# Altium PCB PCB1.PcbDoc
Units mil, origin at the board's own origin, x right, y up, seen from the top; angles counter-clockwise.
Board outline 1100 x 875 mil, 4 copper layers (Top Layer, T 1, Layer 2, Bottom Layer), stack 23.756 mil thick; 5 components, 5 nets, 17 pads, 3 vias.
Unrouted connection lines stored in the file: 8.
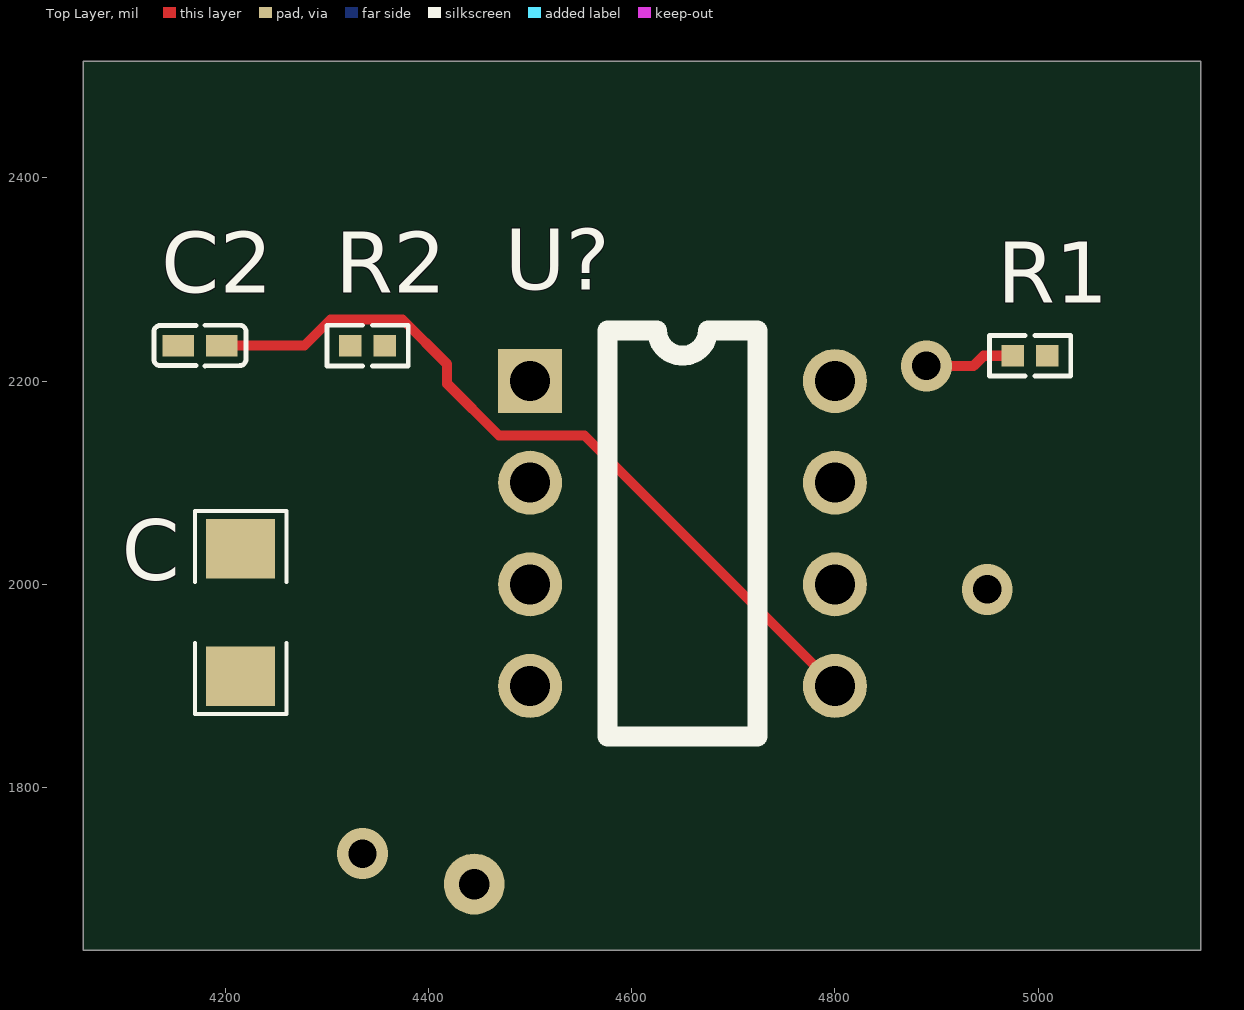
[diagram p0: Top Layer view]
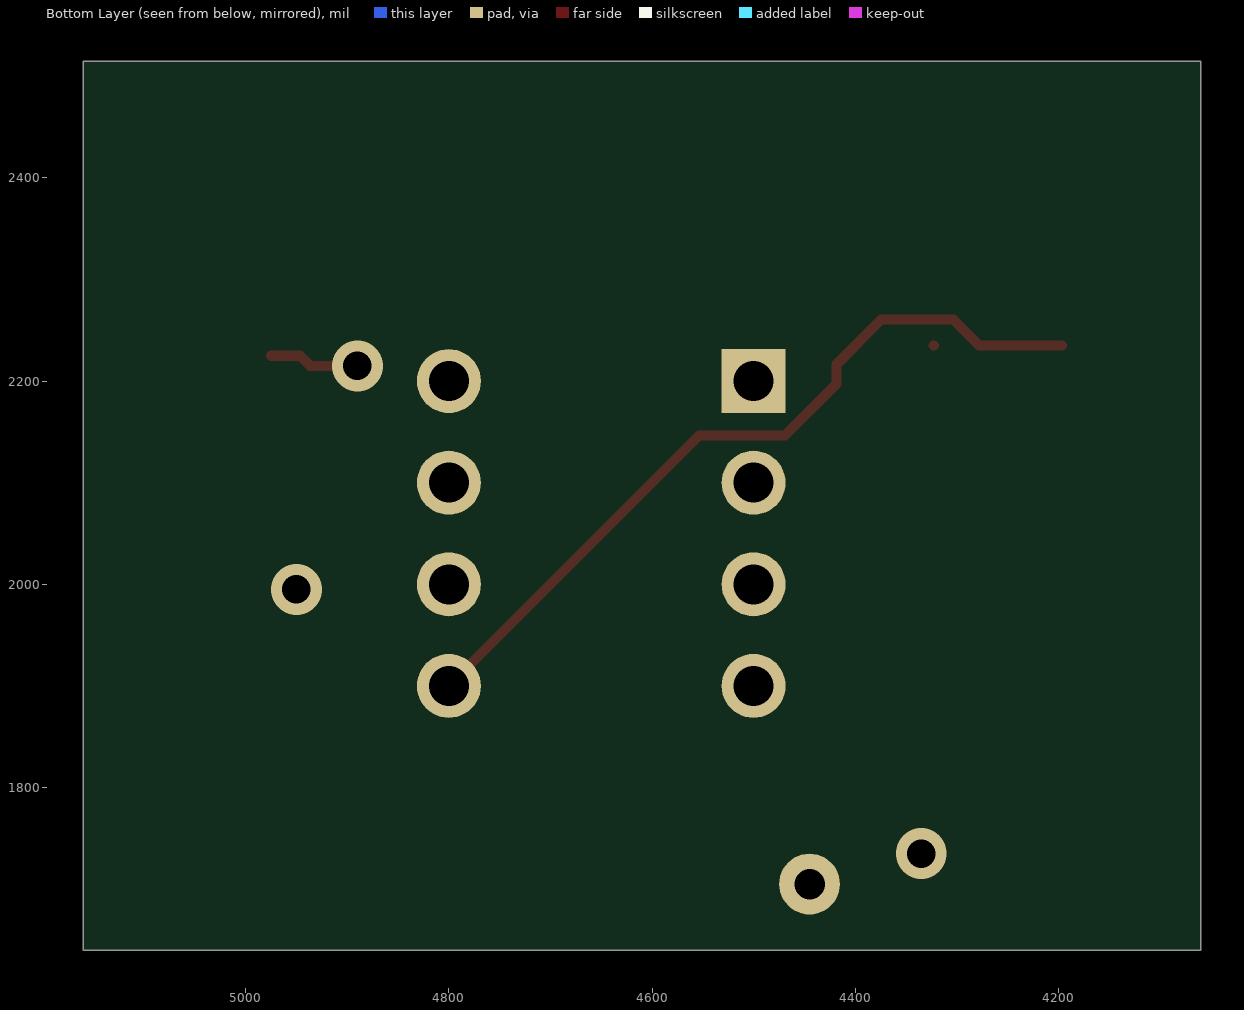
[diagram p1: Bottom Layer view, seen from below]
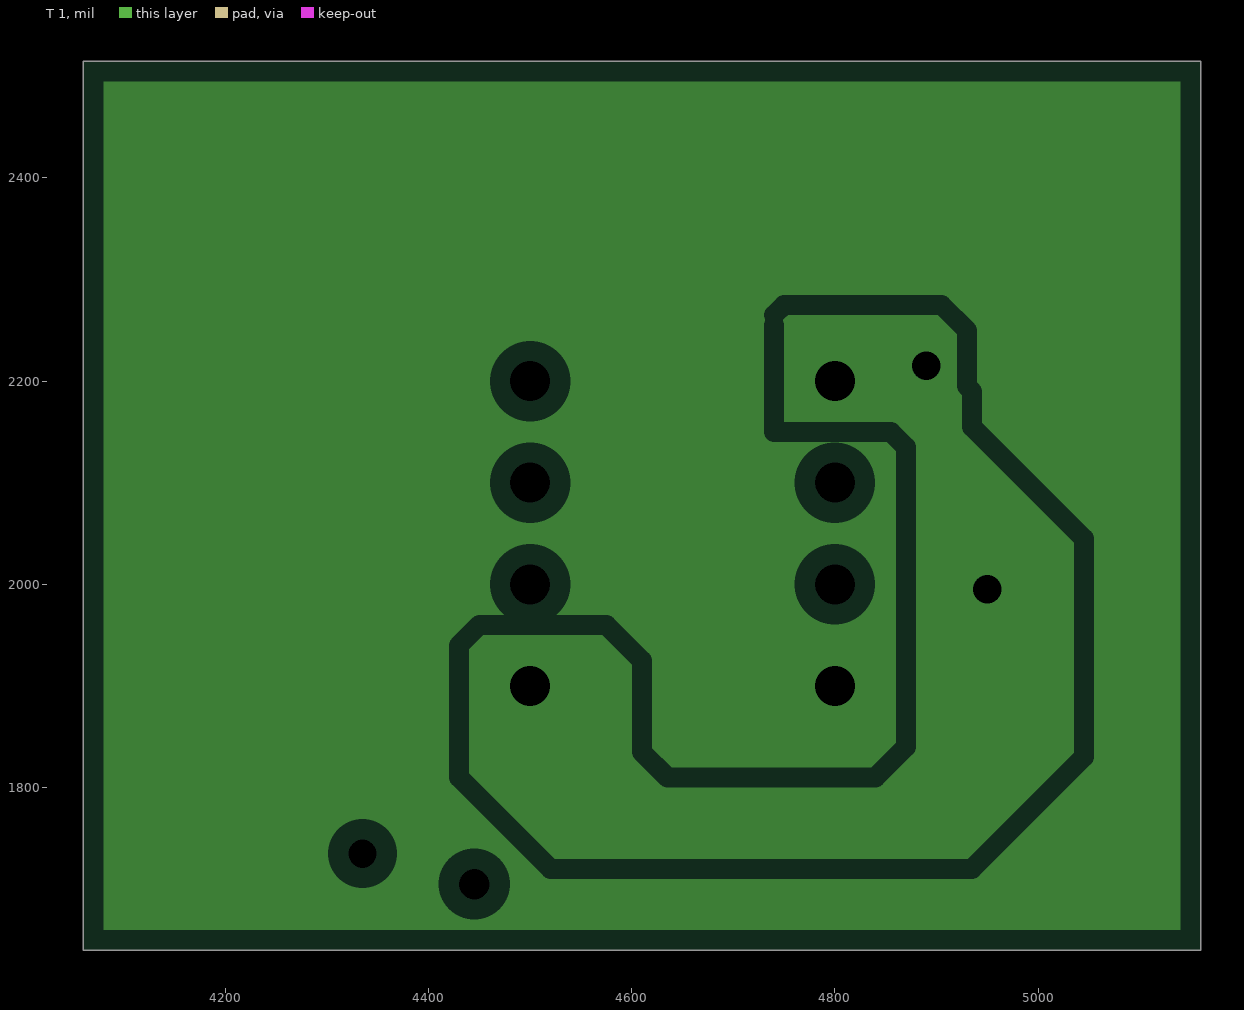
[diagram p2: T 1, clearances drawn from the general rule]
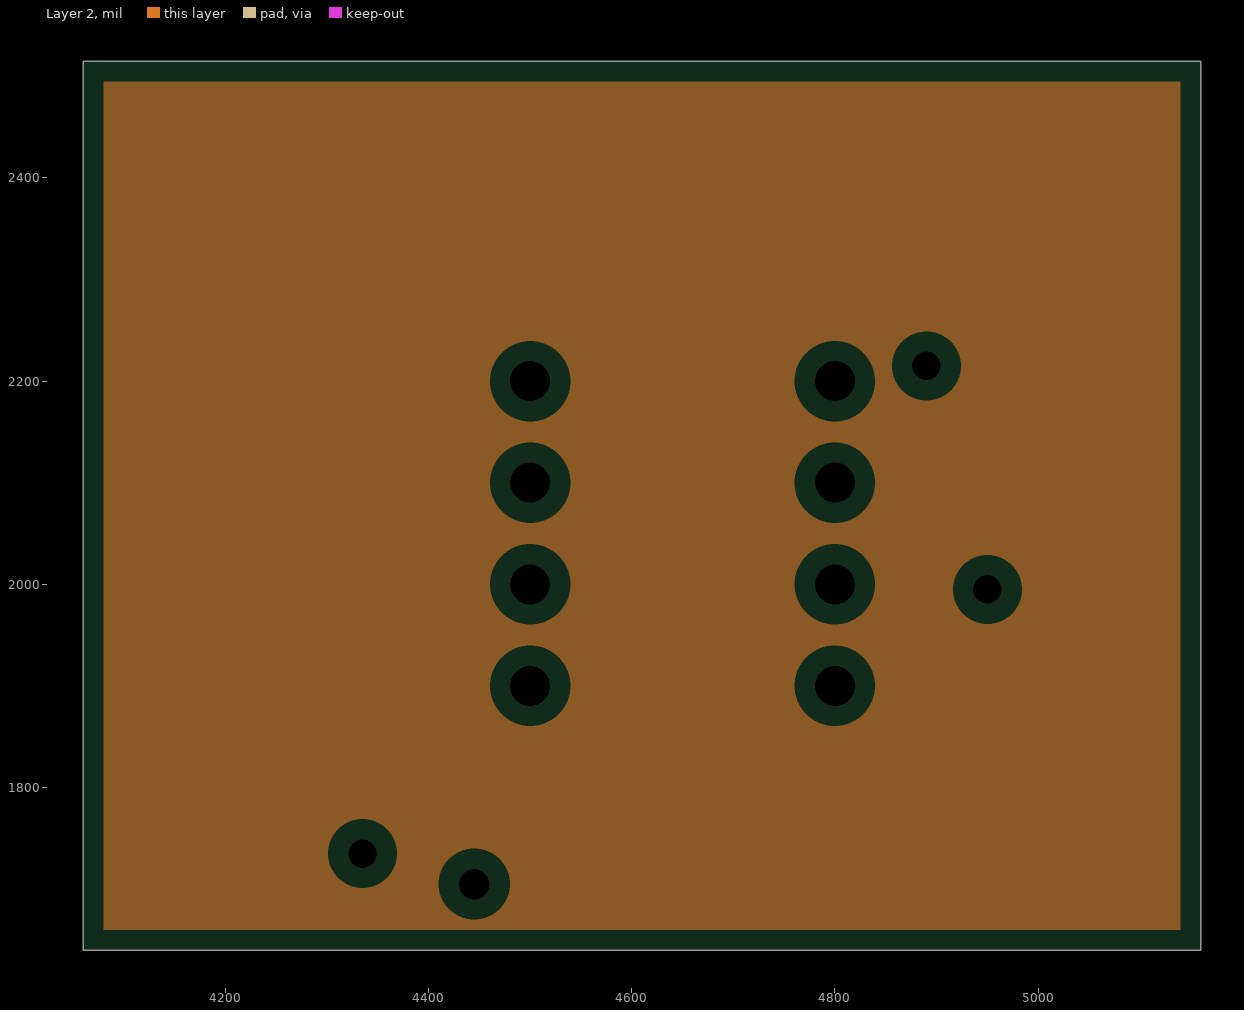
[diagram p3: Layer 2, clearances drawn from the general rule]

## Layer stack, top to bottom
Top Solder: solder mask 0.4, Solder Resist, Dk 3.5
Top Layer: signal copper 1.4
Dielectric 2: prepreg 2.8, PP-006, Dk 4.1
T 1: plane copper 1.378, net NetC2_2
Dielectric 1: dielectric 12.6, FR-4, Dk 4.8
Layer 2: plane copper 1.378
Dielectric 3: prepreg 2.8, PP-006, Dk 4.1
Bottom Layer: signal copper 1.4
Bottom Solder: solder mask 0.4, Solder Resist, Dk 3.5

## Board outline
4060,1640 5160,1640 5160,2515 4060,2515

## Design rules (kind name [scope] priority, off if disabled: settings)
Clearance [All] p1: gap=10 ignorepadtopadclearanceinfootprint=FALSE except(0: Arc-Hole Track-Hole SMDPad-Hole THPad-Hole Via-Hole Fill-Hole Poly-Hole Region-Hole Text-Hole)
PlaneClearance [All] p1: clearance=20
PlaneConnect [All] p1: planeconnectstyle=Relief reliefexpansion=20 reliefentries=4 reliefconductorwidth=10 reliefairgap=10
PolygonConnect [All] p1: connectstyle=Relief reliefconductorwidth=10 reliefentries=4 polygonreliefangle="90 Angle" airgapwidth=10
RoomDefinition sheet [InComponentClass('sheet')] p1: confinementstyle=ConfineIn formatcopy=TRUE lockcomponents=FALSE outline 5205,1705 6305,1705 6305,2235 5205,2235
RoutingVias [All] p1: holewidth=28 width=50 viastyle="Through Hole" minholewidth=28 minwidth=50 maxholewidth=28 maxwidth=50
SolderMaskExpansion [All] p1: expansion=4 istentingtop=FALSE
Width [All] p1: maxlimit=10 minlimit=10 preferedwidth=10
28 further rules are at their usual default settings.

## Components (designator, comment, footprint, x,y, rotation, side; value= is the part's Value field where it differs from the comment)
C "1uF" "SMD 1.485 1.728" 4215,1972.28 r90 top
C2 "1uF" "SMD 0.79 0.54" 4175,2235 r0 top
R1 "1K" "SMD 0.566 0.54" 4992.05,2225 r180 top
R2 "1K" "SMD 0.566 0.54" 4340,2235 r0 top
U? "NE555" NE555_DIP8 4500,2200 r0 top

## Footprints (in the part's own frame and the unit in brackets; to place one, negate y for a bottom-side part, rotate by r counter-clockwise, add the part's x,y. Pads: shape width x height; smd on the part's side, far side on the other; paste and mask are expansions set on the pad)
NE555_DIP8 [mm]
  rect 1.6x1.6 hole 1: 1(0,0)
  round 1.6 hole 1: 2(0,-2.54) 3(0,-5.08) 4(0,-7.62) 5(7.62,-7.62) 6(7.62,-5.08) 7(7.62,-2.54) 8(7.62,0)
  silkscreen extent 1.93,-8.89 5.69,1.27
"SMD 0.79 0.54" [mm]
  rect 0.79x0.54 smd: 1(-0.545,0) 2(0.545,0)
  silkscreen extent -1.15,-0.51 1.15,0.51
"SMD 0.566 0.54" [mm]
  rect 0.566x0.54 smd: 1(-0.433,0) 2(0.433,0)
  silkscreen extent -1.02,-0.51 1.02,0.51
"SMD 1.485 1.728" [mm]
  rect 1.485x1.728 smd: 1(-1.593,0) 2(1.593,0)
  silkscreen extent -2.54,-1.14 2.54,1.14

## Part data
C C2: library part "CAP 1uF", "SMD 0402"
R1 R2: library part "RES 1K", "SMD"

## Free pads (board coordinates)
  round 60 hole 30: 2(4445,1705)

## Via types
v1: diameter 50, hole 28, Top Layer to Bottom Layer, 2 vias
v2: diameter 50/50 (per signal layer), hole 28, Top Layer to Bottom Layer, 1 vias

## Nets (pads, with @x,y where several pads share a name; then routed paths per layer and width w, separated by ;. In a path a pad name is that pad's centre, name@x,y a point inside that pad or via, vN(x,y) a via of type N, cw(c..) or ccw(c..) an arc to the next point about the centre after c; other vN are vias at no path point)
+5: R1.2 U?.4 U?.8 | length 89.1
  Top Layer w10: v1(4890,2215) 4936.48,2215 4946.48,2225 R1.2
  other v2: 4950,1995
GND: C2.1 C.1 U?.1
  other v1: 4335,1735
NetC2_2: C2.2 U?.5 | length 774.8
  Top Layer w10: C2.2 4277.89,2235 4303.52,2260.63 4374.4,2260.63 4418.35,2216.69 4418.35,2197.45 4469.3,2146.5 4553.5,2146.5 U?.5
NetC_2: C.2 R2.1 U?.2 U?.6 | length 0.5
  Top Layer w10: R2.1@4322.44,2235 R2.1
NetR1_1: R1.1 R2.2 U?.7
pads on no net: U?.3

## Polygon pours and split planes (outlines as drawn)
+5 on T 1 (split plane): 4920.07,2245.89 4920.07,2195 4920.41,2192.43 4921.4,2190.04 4922.98,2187.98 4925.07,2185.89 4925.07,2155 4925.41,2152.43 4926.4,2150.04 4927.98,2147.98 5035.07,2040.89 5035.07,1834.11 4930.89,1729.93 4524.11,1729.93 4439.93,1814.11 4439.93,1935.89 4454.11,1950.07 4570.89,1950.07 4600.07,1920.89 4600.07,1835 4600.41,1832.43 4601.4,1830.04 4602.98,1827.98 4627.98,1802.98 4628.87,1802.3 4630.04,1801.4 4632.43,1800.41 4635,1800.07 4840,1800.07 4842.57,1800.41 4844.96,1801.4 4847.02,1802.98 4877.02,1832.98 4878.6,1835.04 4879.59,1837.43 4879.93,1840 4879.93,2135 4879.59,2137.57 4878.6,2139.96 4877.02,2142.02 4862.02,2157.02 4859.96,2158.6 4857.57,2159.59 4855,2159.93 4749.93,2159.93 4749.93,2160 4749.93,2255 4749.59,2257.57 4748.72,2259.68 4754.11,2265.07 4900.89,2265.07
NetC2_2 on T 1 (split plane): 5139.9,1660.1 4080.1,1660.1 4080.1,2494.9 5139.9,2494.9
no net on Layer 2 (split plane): 5139.9,1660.1 4080.1,1660.1 4080.1,2494.9 5139.9,2494.9

## Other copper
T 1 (plane layer: these items are gaps in the copper):
  lines w19.68: 4740,2255 4740,2160 4740,2150 4855,2150 4870,2135 4870,1840 4840,1810 4635,1810 4610,1835 4610,1925 4575,1960 4450,1960 4430,1940 4430,1810 4520,1720 4935,1720 5045,1830 5045,2045 4935,2155 4935,2190 4930,2195 4930,2250 4905,2275 4750,2275 4740,2265